# Altium PCB 搅拌杯PCB.PcbDoc
Units mm, origin at the board's own origin, x right, y up, seen from the top; angles counter-clockwise.
Board outline 36 x 32.5 mm, 2 copper layers (Top Layer, Bottom Layer); 74 components, 45 nets, 191 pads, 40 vias.
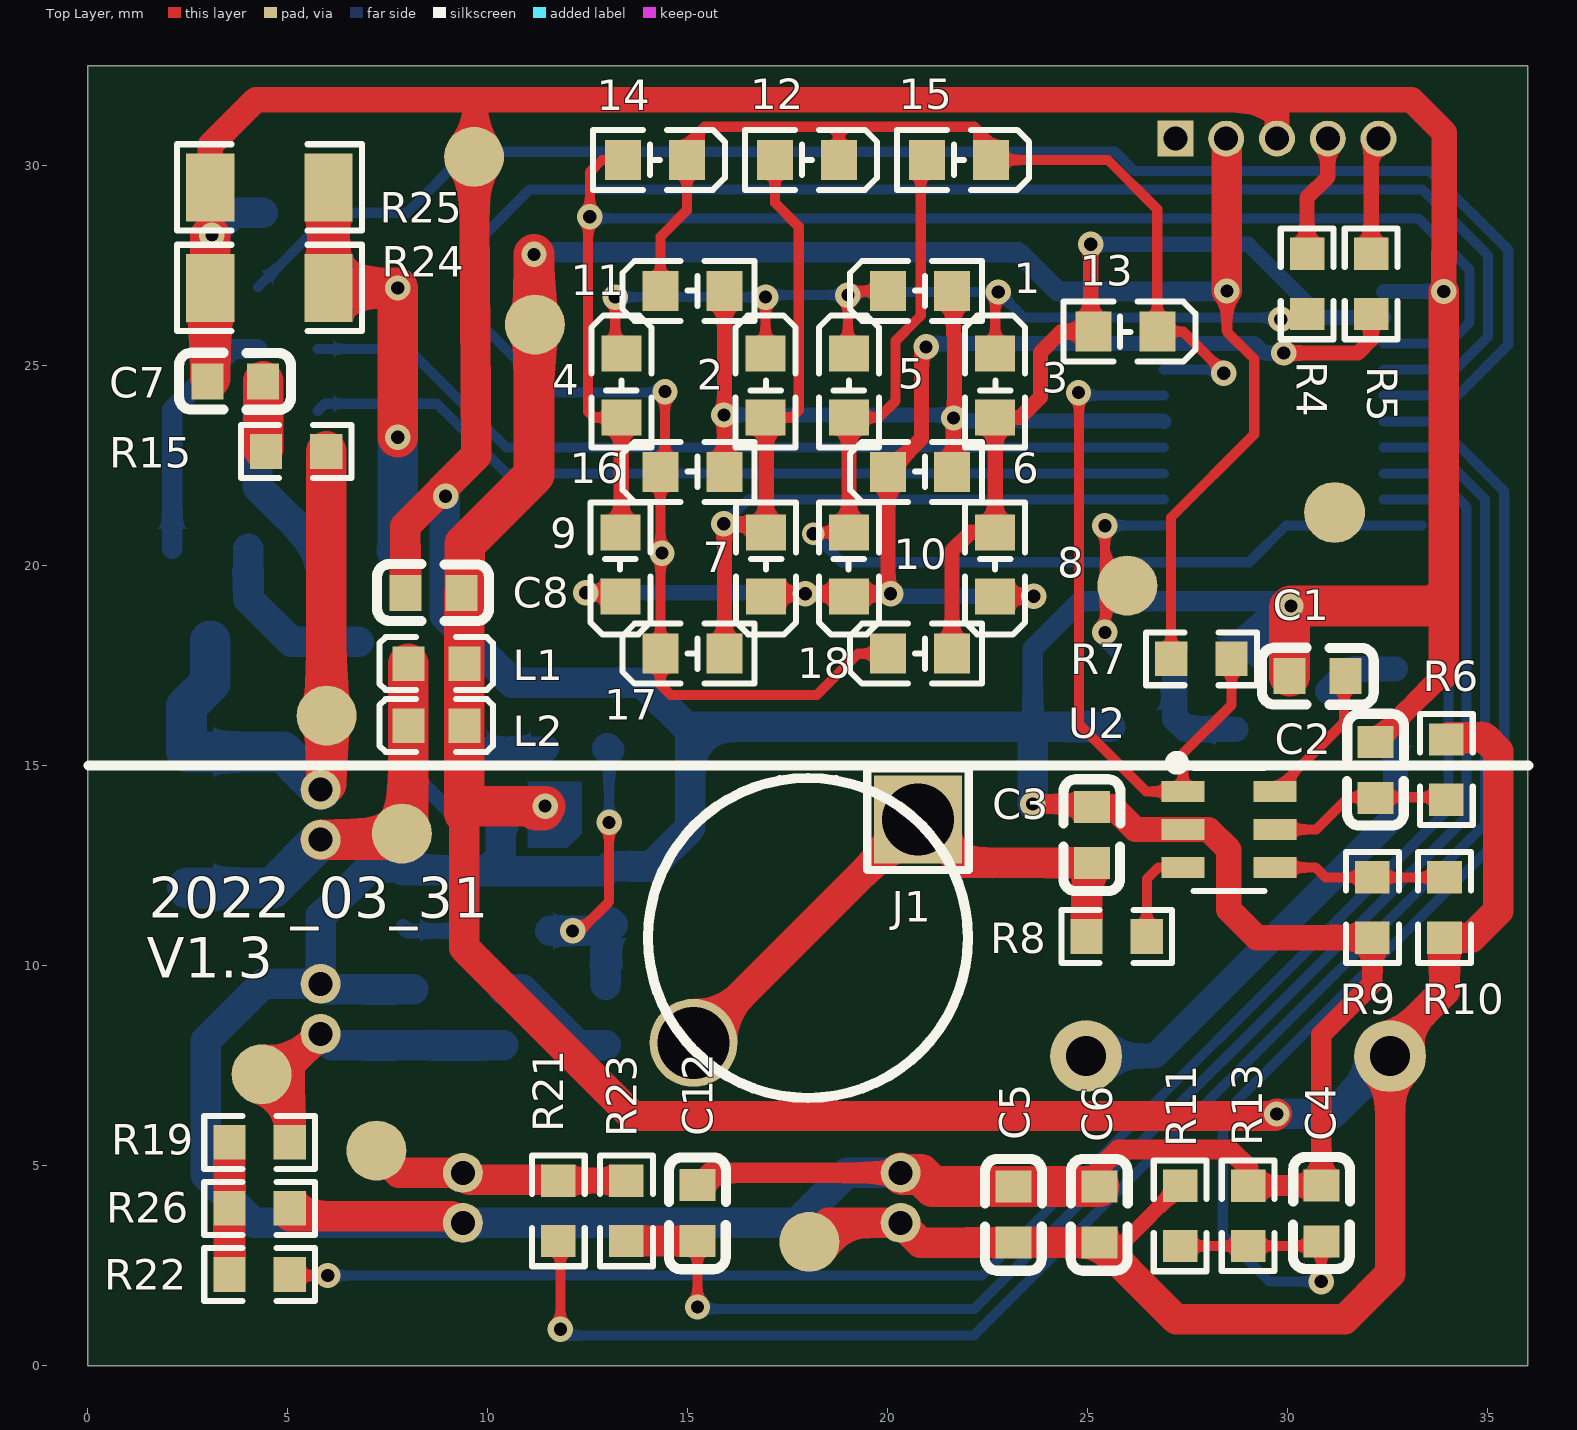
[diagram p0: Top Layer view]
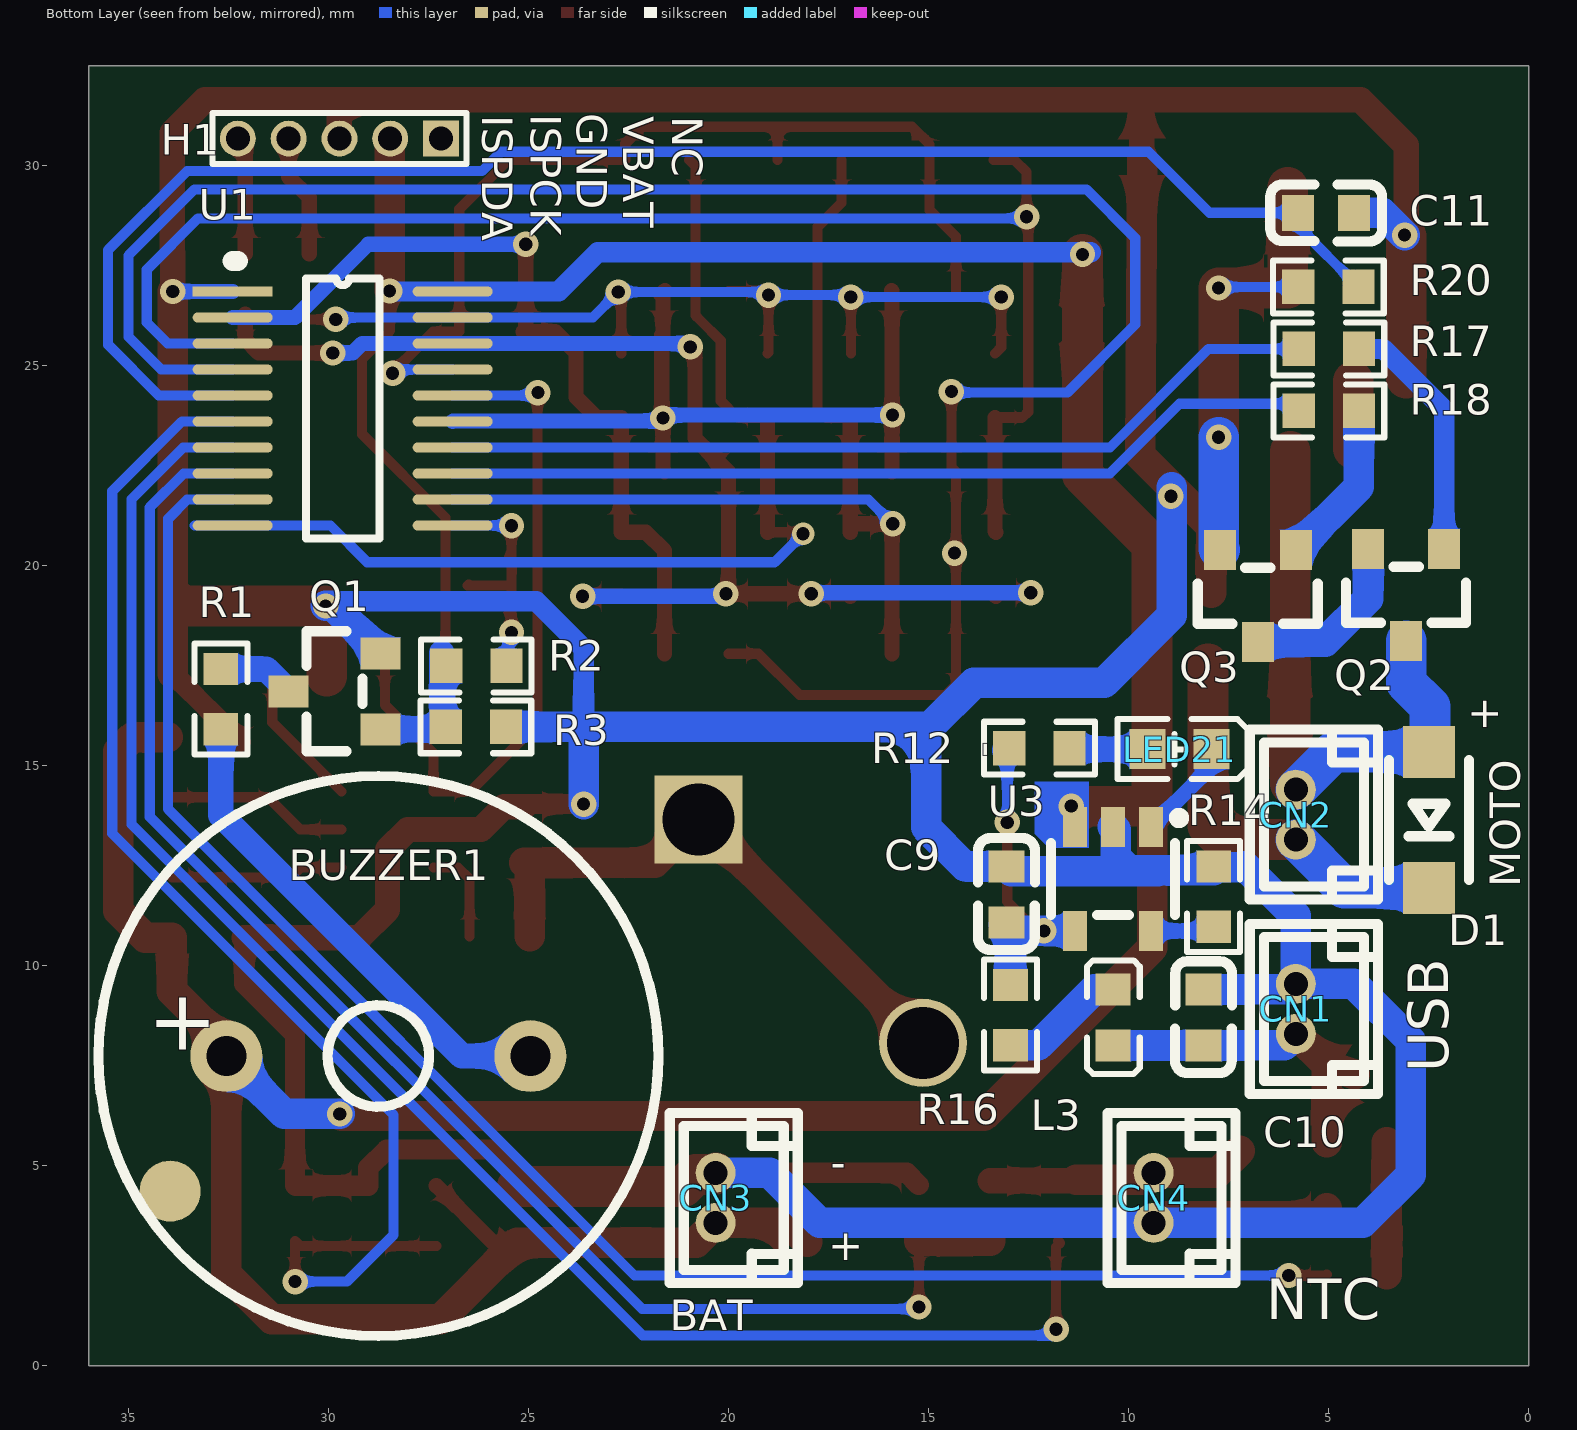
[diagram p1: Bottom Layer view, seen from below]

## Layer stack, top to bottom
Top Solder: solder mask 0.0102, Solder Resist, Dk 3.5
Top Layer: signal copper 0.0356
Dielectric 1: dielectric 0.32, FR-4, Dk 4.8
Bottom Layer: signal copper 0.0356
Bottom Solder: solder mask 0.0102, Solder Resist, Dk 3.5

## Board outline
0,0 0,32.5 36,32.5 36,0

## Design rules (kind name [scope] priority, off if disabled: settings)
Clearance [All] p1: gap=0.203 ignorepadtopadclearanceinfootprint=FALSE except(0: Arc-Hole Track-Hole SMDPad-Hole THPad-Hole Via-Hole Fill-Hole Poly-Hole Region-Hole Text-Hole)
ComponentClearance [All] p1 off: gap=0.254 collisioncheckmode=3 verticalgap=0.254 showdistances=FALSE
PolygonConnect [All] p1: connectstyle=Relief reliefconductorwidth=0.254 reliefentries=4 polygonreliefangle="90 Angle" airgapwidth=0.254
RoutingVias [All] p1: holewidth=0.711 width=1.27 viastyle="Through Hole" minholewidth=0.254 minwidth=0.254 maxholewidth=0.711 maxwidth=1.27
SolderMaskExpansion [All] p1: expansion=0.102 istentingtop=FALSE
Width [All] p1: maxlimit=1.27 minlimit=0.203 preferedwidth=0.254
29 further rules are at their usual default settings.

## Components (designator, comment, footprint, x,y, rotation, side; value= is the part's Value field where it differs from the comment)
1 "LED-0603_W" LED0603-FD_WHITE 20.803,26.873 r180 top (schematic designator LED1)
2 "LED-0603_W" LED0603-FD_WHITE 16.942,24.511 r90 top (schematic designator LED2)
3 "LED-0603_W" LED0603-FD_WHITE 22.682,24.511 r90 top (schematic designator LED3)
4 "LED-0603_W" LED0603-FD_WHITE 13.335,24.511 r90 top (schematic designator LED4)
5 "LED-0603_W" LED0603-FD_WHITE 19.025,24.511 r90 top (schematic designator LED5)
6 "LED-0603_W" LED0603-FD_WHITE 20.803,22.352 r180 top (schematic designator LED6)
7 "LED-0603_W" LED0603-FD_WHITE 16.955,20.041 r270 top (schematic designator LED7)
8 "LED-0603_W" LED0603-FD_WHITE 22.682,20.041 r270 top (schematic designator LED8)
9 "LED-0603_W" LED0603-FD_WHITE 13.31,20.041 r270 top (schematic designator LED9)
10 "LED-0603_W" LED0603-FD_WHITE 19.025,20.041 r270 top (schematic designator LED10)
11 "LED-0603_W" LED0603-FD_WHITE 15.113,26.873 r180 top (schematic designator LED11)
12 "LED-0603_W" LED0603-FD_WHITE 17.977,30.15 r0 top (schematic designator LED12)
13 "LED-0603_W" LED0603-FD_WHITE 25.933,25.857 r0 top (schematic designator LED13)
14 "LED-0603_W" LED0603-FD_WHITE 14.173,30.15 r0 top (schematic designator LED14)
15 "LED-0603_W" LED0603-FD_WHITE 21.781,30.15 r0 top (schematic designator LED15)
16 "LED-0603_W" LED0603-FD_WHITE 15.113,22.352 r180 top (schematic designator LED16)
17 "LED-0603_W" LED0603-FD_WHITE 15.113,17.805 r180 top (schematic designator LED17)
18 "LED-0603_W" LED0603-FD_WHITE 20.803,17.805 r180 top (schematic designator LED18)
BUZZER1 "FMQ-BUZZER2" BUZ-TH_BD12.0-P7.60-D0.6-FD 28.753,7.747 r180 bottom
C1 "4.7nF" C0603 30.74,17.245 r180 top
C2 "0.1u" C0603 32.188,14.898 r270 top
C3 "nc" C0603 25.101,13.276 r90 top
C4 "0.1u" C0603 30.836,3.816 r270 top
C5 "1uF" C0603 23.139,3.785 r90 top
C6 "0.1u" C0603 25.286,3.785 r90 top
C7 "0.1u" C0603 3.683,24.613 r0 top
C8 "10uF" C0603 8.636,19.329 r0 top
C9 "4.7uF" C0603 13.056,11.791 r270 bottom
C10 "10uF" C0603 8.128,8.712 r270 bottom
C11 "0.1u" C0603 5.066,28.829 r0 bottom
C12 "0.1u" C0603 15.24,3.821 r90 top
CN1 "0530470210" CONN-TH_0530470210 5.817,8.925 r90 bottom
CN2 "0530470210" CONN-TH_0530470210 5.817,13.782 r90 bottom
CN3 "0530470210" CONN-TH_0530470210 20.32,4.201 r90 bottom
CN4 "0530470210" CONN-TH_0530470210 9.373,4.201 r90 bottom
D1 "1N4148W" SOD-123FL_L2.6-W1.6-LS3.4-RD 2.489,13.648 r270 bottom
H1 "HDR-F-2.54_1x5" 1.27mm_5PIN 27.187,30.683 r0 bottom
J1 "HDR-M-2.54_1x1" HDR-M-2.54_1X1 20.752,13.665 r0 top
L1 "22uH" L0603 8.712,17.551 r0 top
L2 "22uH" L0603 8.712,16.001 r0 top
L3 "BEAD" L0603 10.389,8.712 r270 bottom
LED21 "LED-0603_W" LED0603-FD_WHITE 8.725,15.418 r180 bottom
Q1 "2N7002" SOT-23_L2.9-W1.3-P0.95-LS2.4-BR 29.847,16.866 r180 bottom
Q2 "2N7002" SOT-23_L2.9-W1.3-P0.95-LS2.4-BR 3.059,19.279 r90 bottom
Q3 "2N7002" SOT-23_L2.9-W1.3-P0.95-LS2.4-BR 6.767,19.253 r90 bottom
R1 "50R" R0603 32.69,16.671 r90 bottom
R2 "1K" R0603 26.306,17.501 r180 bottom
R3 "100K" R0603 26.316,15.977 r180 bottom
R4 "100R" R0603 30.48,27.051 r270 top
R5 "100R" R0603 32.08,27.051 r270 top
R6 "0R" R0603 33.96,14.91 r90 top
R7 "10K" R0603 27.838,17.678 r180 top
R8 "1K" R0603 25.72,10.736 r180 top
R9 "NC" R0603 32.112,11.461 r90 top
R10 "NC" R0603 33.915,11.461 r90 top
R11 "3M" R0603 27.305,3.751 r90 top
R12 "1k" R0603 12.226,15.443 r180 bottom
R13 "1M" R0603 29.007,3.754 r270 top
R14 "1k" R0603 7.874,11.735 r90 bottom
R15 "1k" R0603 5.207,22.86 r0 top
R16 "0R" R0603 12.95,8.772 r270 bottom
R17 "100R" R0603 4.992,25.425 r180 bottom
R18 "100R" R0603 4.992,23.876 r180 bottom
R19 "1k" R0603 4.293,5.588 r0 top
R20 "1k" R0603 5.004,26.975 r180 bottom
R21 "200K" R0603 11.76,3.877 r90 top
R22 "1k" R0603 4.293,2.286 r0 top
R23 "1k" R0603 13.462,3.877 r270 top
R24 "1R" R1206 4.538,26.949 r0 top
R25 "1R" R1206 4.538,29.464 r0 top
R26 "100K" R0603 4.293,3.937 r0 top
U1 "ES7P0693FHTF" TSOP20 32.395,26.862 r180 bottom
U2 "AS01C(AI01)" SOT-23-6_L2.9-W1.6-P0.95-LS2.8-BL 28.527,13.411 r270 top
U3 "HE4054B" SOT-23-5_L3.0-W1.7-P0.95-LS2.8-BR 10.389,12.175 r90 bottom

## Footprints (in the part's own frame and the unit in brackets; to place one, negate y for a bottom-side part, rotate by r counter-clockwise, add the part's x,y. Pads: shape width x height; smd on the part's side, far side on the other; paste and mask are expansions set on the pad)
1.27mm_5PIN [mm]
  rect 0.9x0.9 hole 0.6: 1(0,0)
  round 0.9 hole 0.6: 2(1.27,0) 3(2.54,0) 4(3.81,0) 5(5.08,0)
  silkscreen extent -0.64,-0.64 5.71,0.64
BUZ-TH_BD12.0-P7.60-D0.6-FD [mm]
  round 1.8 hole 1: 1(-3.8,0) 2(3.8,0)
  silkscreen extent -7,-7 7,7
C0603 [mm]
  rect 0.8x0.9 smd: 1(-0.7,0) 2(0.7,0)
  silkscreen extent -1.41,-0.71 1.39,0.72
CONN-TH_0530470210 [mm]
  round 1 hole 0.6: 1(-0.625,0) 2(0.625,0)
  silkscreen extent -2.13,-2.05 2.13,1.15
HDR-M-2.54_1X1 [mm]
  rect 2.2x2.2 hole 1.8: 1(0,0)
  silkscreen extent -1.27,-1.27 1.27,1.27
L0603 [mm]
  rect 0.8x0.864 smd: 1(-0.7,0) 2(0.7,0)
  silkscreen extent -1.42,-0.65 1.41,0.67
LED0603-FD_WHITE [mm]
  rect 0.9x1 smd: 1(-0.8,0) 2(0.8,0)
  silkscreen extent -1.55,-0.75 1.75,0.75
R0603 [mm]
  rect 0.806x0.864 smd: 1(-0.753,0) 2(0.753,0)
  silkscreen extent -1.39,-0.66 1.39,0.66
R1206 [mm]
  rect 1.208x1.701 smd: 1(-1.479,0) 2(1.479,0)
  silkscreen extent -2.31,-1.08 2.31,1.08
SOD-123FL_L2.6-W1.6-LS3.4-RD [mm]
  rect 1.3x1.3 smd: 1(1.7,0) 2(-1.7,0)
  silkscreen extent -1.5,-1 1.5,1
SOT-23-5_L3.0-W1.7-P0.95-LS2.8-BR [mm]
  rect 1x0.6 smd: 1(1.3,-0.95) 2(1.3,0) 3(1.3,0.95) 4(-1.3,0.95) 5(-1.3,-0.95)
  silkscreen extent -0.9,-1.78 1.65,1.55
SOT-23-6_L2.9-W1.6-P0.95-LS2.8-BL [mm]
  rect 0.532x1.072 smd: 1(-0.95,-1.149) 2(0,-1.149) 3(0.95,-1.149) 4(0.95,1.149) 5(0,1.149) 6(-0.95,1.149)
  silkscreen extent -1.82,-1.45 1.54,0.89
SOT-23_L2.9-W1.3-P0.95-LS2.4-BR [mm]
  rect 1x0.8 smd: 1(1.15,-0.95) 2(1.15,0.95) 3(-1.15,0)
  silkscreen extent -0.7,-1.5 0.7,1.5
TSOP20 [mm]
  rect 2x0.25 smd: 1(0,0)
  oval 2x0.25 smd: 2(0,-0.65) 3(0,-1.3) 4(0,-1.95) 5(0,-2.6) 6(0,-3.25) 7(0,-3.9) 8(0,-4.55) 9(0,-5.2) 10(0,-5.85) 11(5.5,-5.85) 12(5.5,-5.2) 13(5.5,-4.55) 14(5.5,-3.9) 15(5.5,-3.25) 16(5.5,-2.6) 17(5.5,-1.95) 18(5.5,-1.3) 19(5.5,-0.65) 20(5.5,0)
  silkscreen extent 0,-6.18 3.66,0.76

## Part data
L3: library part 22uH
R1: library part 100R
R3: library part 1K
R6 R7 R16: library part NC
R11: library part 430k
R13: library part 430K
R21 R26: library part 33K

## Free pads (board coordinates)
  round 2.2 hole 1.8: 0(15.138,8.077)
  round 1.5 smd: 2(4.343,7.29) 2(5.969,16.256) 2(7.214,5.385) 2(7.849,13.31) 2(9.652,30.226) 2(11.176,26.035) 2(18.034,3.099) 2(25.984,19.507)
  round 1.524 smd: 3(31.166,21.336)
  round 2.54 on Top Solder: 3(31.166,21.336)
  round 1.524 smd far side: 3(33.96,4.369)
  round 2.54 on Bottom Solder: 3(33.96,4.369)

## Via types
v1: diameter 0.635, hole 0.33, Top Layer to Bottom Layer, tented both sides, 39 vias
v2: diameter 0.559, hole 0.33, Top Layer to Bottom Layer, 1 vias

## Nets (pads, with @x,y where several pads share a name; then routed paths per layer and width w, separated by ;. In a path a pad name is that pad's centre, name@x,y a point inside that pad or via, vN(x,y) a via of type N, cw(c..) or ccw(c..) an arc to the next point about the centre after c; other vN are vias at no path point)
BUZZER: pad.2@25.984,19.507 R2.2 U1.11 | length 5.9
  Top Layer w0.254: v1(25.425,18.339) pad.2@25.425,19.482 ; v1(25.425,21.006) pad.2@25.425,19.482 ; pad.2@26.492,19.533 26.518,19.507 25.984,19.507 25.451,19.507 pad.2@25.425,19.482
  Bottom Layer w0.254: v1(25.425,18.339) 25.425,18.07 R2.2@25.664,17.831 ; v1(25.425,21.006) 25.431,21.011 U1.11
GND: C1.2 C2.1 C3.2 C4.1 C5.2 C6.2 C7.1 C8.1 C9.1 C10.1 C11.1 C12.2 CN1.2 CN3.2 CN4.1 H1.3 pad.2@9.652,30.226 Q1.2 R3.2 R9.1 R13.1 R14.2 R24.1 R25.1 R26.2 U1.1 U2.2 U3.2 | length 192.5
  Top Layer w0.508: C12.2 15.545,4.826 CN3.2 ; v1(23.622,14.046) 25.031,14.046 C3.2 ; C6.2 25.286,4.94 25.756,5.41 28.55,5.41 29.007,4.953 R13.1 30.827,4.507 C4.1 30.836,8.28 32.112,9.556 R9.1 ; C2.1 33.895,17.306
  Top Layer w0.635: C7.1 C7.1@3.059,24.689 ; v1@3.059,28.27 R25.1 3.059,30.516 4.197,31.654 9.693,31.654 ; pad.2@9.652,30.226 9.693,31.591 9.693,31.598 9.693,31.654 ; C3.2 25.622,13.976 26.187,13.411 U2.2 28.016,13.411 28.524,12.903 28.524,11.405 29.221,10.708 R9.1 ; H1.3@29.727,30.836 29.727,31.267 29.34,31.654 ; 33.909,27.661 33.909,30.836 33.091,31.654 29.34,31.654 ; 9.693,31.654 29.34,31.654
  Top Layer w0.762: R26.2 5.046,3.742 9.092,3.742 9.258,3.576 CN4.1 ; C8.1 7.936,20.992 9.703,22.758 pad.2@9.652,30.226 ; 33.757,19.101 33.895,19.101 ; 33.895,17.306 33.895,19.101 ; v1(33.895,26.862) 33.895,19.101
  Top Layer w1.016: C7.1@3.059,24.689 R24.1 v1@3.059,28.245 ; CN3.2 20.359,4.787 20.822,4.787 21.124,4.485 C6.2 ; C1.2 30.04,18.966 v1(30.074,18.999) 33.655,18.999 33.757,19.101
  Bottom Layer w0.381: U1.1 v1(33.895,26.862)
  Bottom Layer w0.508: 23.622,16.104 23.622,17.932 24.803,19.113 29.959,19.113 v1(30.074,18.999)
  Bottom Layer w0.762: v1(3.099,28.27) 3.658,28.829 C11.1 ; R14.2 R14.2@7.874,12.471 ; C10.1 5.955,9.412 CN1.2 ; v1@8.915,21.971 8.915,18.771 10.612,17.074 13.863,17.074 14.96,15.977 15.062,15.977 ; 9.267,12.37 12.935,12.37 C9.1 14.091,12.49 15.062,13.462 15.062,15.977 ; U3.2 10.323,13.409 10.323,12.733 9.981,12.391 7.874,12.391 R14.2@7.874,12.471 ; CN3.2 18.974,4.826 17.724,3.576 CN4.1 4.146,3.576 2.946,4.775 2.946,8.128 4.369,9.55 CN1.2 ; v1(23.622,14.046) 23.622,15.977 ; 23.622,16.104 23.749,15.977 ; R3.2 23.749,15.977 ; Q1.2 29.88,18.999 v1(30.074,18.999) ; CN1.2 5.817,11.252 5.842,11.252 7.078,12.488 7.078,12.471 R14.2@7.874,12.471 ; 15.062,15.977 23.622,15.977 ; 23.622,15.977 23.749,15.977
  other v1: 8.941,21.742
IO_OUT: R21.1 U1.7 | length 41.9
  Top Layer w0.254: R21.1 11.709,3.073 11.811,2.971 v1(11.811,0.914)
  Bottom Layer w0.254: v1(11.811,0.914) 11.963,0.762 22.147,0.762 34.925,13.54 34.925,21.666 33.63,22.962 U1.7
ISPCK: H1.4 R4.1 | length 3.2
  Top Layer w0.381: R4.1 30.48,29.21 30.997,29.727 H1.4 H1.4@30.997,30.836
ISPDA: H1.5 R5.1 | length 3.1
  Top Layer w0.381: R5.1 32.08,30.649 H1.5@32.267,30.836
LED_IO_0: 1.2 2.2 3.2 4.2 5.2 R4.2 U1.19 | length 24.9
  Top Layer w0.254: v1(13.183,26.721) 13.183,25.463 4.2 ; 2.2 v1(16.942,26.721) ; 5.2 18.999,25.336 v1(18.999,26.772) 19.101,26.873 1.2 ; 3.2 22.682,26.772 v1(22.758,26.848) ; v1(29.82,26.162) 30.556,26.162 R4.2@30.605,26.212
  Bottom Layer w0.254: v1(13.183,26.721) v1(16.942,26.721) 16.992,26.772 v1(18.999,26.772) 18.923,26.848 v1(22.758,26.848) 23.395,26.212 U1.19 29.77,26.212 v1(29.82,26.162)
LED_IO_1: 6.2 7.2 8.2 9.2 10.2 R5.2 U1.18 | length 32.9
  Top Layer w0.381: v1(12.446,19.329) 13.348,19.329 13.373,19.304 9.2 ; 7.2 17.019,19.304 v1(17.932,19.304) v1@20.003,19.304 ; 6.2 v1@20.003,19.304 ; 6.2@20.041,22.39 20.841,23.19 20.841,25.387 20.879,25.349 20.98,25.451 v1(20.955,25.476) ; v1(20.066,19.304) v1@20.003,19.304 ; 8.2 v1(23.647,19.241) ; v1(29.896,25.324) 31.75,25.324 32.08,25.654 R5.2
  Bottom Layer w0.381: v1(12.446,19.329) 17.907,19.329 v1(17.932,19.304) ; v1(20.066,19.304) 20.129,19.241 v1(23.647,19.241) ; v1@20.913,25.478 20.937,25.502 20.955,25.483 v1(20.955,25.476) 21.04,25.562 U1.18 29.159,25.562 29.397,25.324 v1(29.896,25.324)
LED_IO_2: 11.2 12.2 13.2 14.2 15.2 U1.17 | length 24.5
  Top Layer w0.254: 11.2 14.313,28.232 14.973,28.892 14.2 14.973,30.535 15.418,30.98 18.777,30.98 ; 12.2 18.777,30.98 ; v1(28.397,24.816) 28.397,24.841 27.381,25.857 13.2 26.733,28.918 25.502,30.15 15.2 22.581,30.556 22.157,30.98 18.777,30.98
  Bottom Layer w0.254: U1.17 v1@28.397,24.912
LED_IO_3: 16.2 17.2 18.2 U1.4 | length 52.3
  Top Layer w0.254: v1(14.427,24.359) 14.427,22.466 16.2 17.2 14.313,17.03 14.568,16.775 18.223,16.775 19.253,17.805 18.2
  Bottom Layer w0.254: v1@14.173,24.333 11.532,24.333 9.83,26.035 9.83,28.194 11.049,29.413 33.35,29.413 35,27.763 35,25.729 34.183,24.912 U1.4 ; v1@14.326,20.32 v1(14.351,20.32) v1@14.427,20.396
LED_IO_4: 1.1 6.1 11.1 16.1 U1.15 | length 20.5
  Top Layer w0.381: 16.1 11.1 11.1@15.926,26.886 ; 1.1@21.59,26.886 1.1 21.692,26.784 21.641,26.733 21.641,25.796 21.666,25.771 21.666,23.724 v1(21.641,23.698) ; 6.1 21.641,22.39 v1(21.641,23.698) ; v1@21.641,23.749 v1(21.641,23.698)
  Bottom Layer w0.381: v1(15.9,23.774) v1@21.641,23.774 ; v1(21.641,23.698) v1@21.641,23.774 ; U1.15 26.885,23.622 21.615,23.622 21.565,23.673 21.565,23.698 v1@21.641,23.774
LED_IO_5: 2.1 7.1 12.1 17.1 U1.12 | length 25.6
  Top Layer w0.254: 2.1 17.59,23.711 17.772,23.893 17.772,28.481 17.177,29.077 12.1
  Top Layer w0.381: v1(15.896,21.052) v1@15.913,21.052 ; 17.1 v1@15.913,21.052 ; 7.1@16.744,21.052 v1@15.913,21.052 ; 2.1 16.955,23.697 7.1
  Bottom Layer w0.254: v1(15.896,21.052) 16.505,21.662 U1.12
LED_IO_6: 3.1 8.1 13.1 18.1 U1.2 | length 21
  Top Layer w0.381: 18.1 21.603,20.383 22.06,20.841 8.1 3.1 23.305,23.711 23.812,24.219 23.812,25.336 24.333,25.857 13.1@25.07,25.857 ; v1(25.07,28.042) 13.1@25.07,25.857 ; 13.1 13.1@25.07,25.857
  Bottom Layer w0.381: v1(25.07,28.042) 29.007,28.042 30.837,26.212 U1.2
LED_IO_7: 4.1 9.1 14.1 U1.3 | length 37.1
  Top Layer w0.254: 4.1 12.649,23.711 12.505,23.855 12.505,28.685 v1(12.548,28.727) 12.548,29.845 12.852,30.15 14.1
  Top Layer w0.381: 9.1 13.335,20.866 4.1
  Bottom Layer w0.254: v1@12.446,28.702 12.471,28.727 v1(12.548,28.727) ; v1@12.53,28.778 12.548,28.761 v1(12.548,28.727) ; U1.3 34.02,25.562 34.543,26.085 34.543,27.408 33.261,28.689 12.586,28.689 v1(12.548,28.727)
LED_IO_8: 5.1 10.1 15.1 U1.10 | length 27.3
  Top Layer w0.254: v2(18.136,20.803) 18.174,20.841 10.1 ; 5.1 19.774,23.711 20.193,24.13 20.193,25.63 20.712,26.149 20.714,26.149 20.823,26.258 20.823,29.992 15.1
  Top Layer w0.381: 10.1 5.1
  Bottom Layer w0.254: v2(18.136,20.803) 18.847,20.091 29.032,20.091 29.952,21.011 U1.10 U1.10@33.345,21.011
MOTO_CONTROL_A: R17.1 U1.14 | length 22.2
  Bottom Layer w0.254: R17.1 8.001,25.425 10.465,22.962 U1.14
MOTO_CONTROL_B: R18.1 U1.13 | length 21.9
  Bottom Layer w0.254: R18.1 5.923,24.054 8.726,24.054 10.468,22.312 U1.13
MOTO_CURRERN: C11.2 R20.2 U1.5 | length 39.9
  Bottom Layer w0.254: R20.2 5.766,28.49 C11.2 7.976,28.829 9.5,30.353 25.679,30.353 26.162,29.87 33.54,29.87 35.509,27.901 35.509,25.527 34.244,24.262 U1.5
NetBUZZER1_2: BUZZER1.2 R1.1 | length 12.4
  Bottom Layer w0.635: BUZZER1.2 26.67,7.747 32.69,13.767 R1.1
NetC1_1: C1.1 U2.6 | length 3.6
  Top Layer w0.254: U2.6 31.408,16.093 31.408,17.245 C1.1
NetC2_2: C2.2 R6.1 U2.5 | length 4.7
  Top Layer w0.254: U2.5 30.709,13.411 31.514,14.216 R6.1@34.017,14.216
NetC3_1: C3.1 J1.1 pad.0 R8.2 | length 14.6
  Top Layer w0.762: pad.0 J1.1@20.726,13.665 ; J1.1 21.841,12.576 C3.1 24.966,12.442 R8.2
NetC7_2: C7.2 R15.1 | length 1.8
  Top Layer w0.762: R15.1@4.383,22.931 R15.1
  Top Layer w1.016: R15.1@4.383,22.931 C7.2
NetC9_2: C9.2 R12.1 R16.1 U3.4 | length 8.4
  Top Layer w0.254: v1(12.116,10.875) 12.298,10.875 13.03,11.608 v1(13.03,13.589)
  Bottom Layer w0.254: v1(13.03,13.589) R12.1@13.03,15.392
  Bottom Layer w0.762: U3.4@11.557,10.875 v1(12.116,10.875) 12.84,10.875 C9.2@12.95,10.985 ; R16.1 C9.2@12.95,10.985 ; R12.1 R12.1@13.03,15.392 ; C9.2@12.95,10.985 C9.2@12.989,11.024 ; C9.2@12.989,11.024 13.123,11.024 C9.2 C9.2@12.989,11.024
NetCN2_1: CN2.1 D1.1 L1.1 L2.1 pad.2@7.849,13.31 | length 10.2
  Top Layer w1.016: CN2.1 7.671,13.157 8.012,13.499 L2.1 L1.1
  Bottom Layer w1.016: D1.1 4.608,11.948 CN2.1
NetCN2_2: CN2.2 D1.2 pad.2@5.969,16.256 Q2.3 R15.2 | length 15.3
  Top Layer w0.762: CN2.2 CN2.2@5.96,14.551
  Top Layer w1.016: CN2.2@5.96,14.551 R15.2
  Bottom Layer w1.016: Q2.3 3.059,17.08 2.464,16.485 2.464,15.374 D1.2 4.876,15.348 CN2.2
NetCN4_2: CN4.2 pad.2@7.214,5.385 R21.2 R23.1 | length 6.6
  Top Layer w0.635: 11.303,4.66 11.333,4.63 R21.2 R23.1
  Top Layer w0.762: pad.2@7.214,5.385 7.772,4.826 CN4.2 9.539,4.66 11.303,4.66
NetL3_1: L3.1 R16.2 | length 3.1
  Bottom Layer w0.762: L3.1 10.857,9.412 12.251,8.019 R16.2
NetLED21_1: LED21.1 R12.2 | length 2
  Bottom Layer w0.635: LED21.1 11.448,15.418 R12.2
NetLED21_2: LED21.2 U3.1 | length 2.6
  Bottom Layer w0.381: LED21.2 7.925,14.989 U3.1
NetQ1_1: Q1.1 R2.1 R3.1 | length 3.3
  Bottom Layer w0.635: R2.1@27.171,17.831 27.171,16.18 27.435,15.916 Q1.1
NetQ1_3: Q1.3 R1.2 | length 1.9
  Bottom Layer w0.635: Q1.3 31.555,17.424 R1.2
NetQ2_1: Q2.1 R17.2 | length 6.2
  Bottom Layer w0.508: Q2.1 2.109,23.902 3.632,25.425 R17.2
NetQ2_2: Q2.2 Q3.3 | length 4.5
  Bottom Layer w0.762: Q2.2 4.009,19.181 5.087,18.103 Q3.3
NetQ3_1: Q3.1 R18.2 | length 4.1
  Bottom Layer w0.762: R18.2 4.239,21.981 Q3.1
NetQ3_2: Q3.2 R20.1 R24.2 R25.2 | length 12.8
  Top Layer w1.016: R25.2 R24.2 v1(7.747,26.949) v1(7.747,23.216)
  Bottom Layer w0.254: R20.1 7.722,26.975 v1(7.747,26.949)
  Bottom Layer w1.016: Q3.2 7.747,20.433 v1(7.747,23.216)
NetR8_1: R8.1 U2.3 | length 2.5
  Top Layer w0.254: R8.1 26.473,12.173 26.761,12.461 U2.3
NetR9_2: R9.2 R10.2 U2.4 | length 4.3
  Top Layer w0.254: U2.4 30.693,12.461 30.941,12.214 R9.2 R10.2
NetR14_1: R14.1 U3.5 | length 1.6
  Bottom Layer w0.381: R14.1 7.98,10.875 U3.5
NetR19_1: R19.1 R22.1 R26.1 | length 3.3
  Top Layer w0.762: R22.1 R26.1 R19.1
NTC_IN: C12.1 R23.2 U1.8 | length 38.1
  Top Layer w0.254: C12.1@15.238,3.124 C12.1 v1(15.24,1.473)
  Top Layer w0.762: R23.2 C12.1@15.238,3.124
  Bottom Layer w0.254: v1(15.24,1.473) 15.24,1.626 15.443,1.422 22.16,1.422 34.468,13.73 34.468,21.463 33.619,22.312 U1.8
TOUCH_IN: R7.1 U1.16 U2.1 | length 17.7
  Top Layer w0.254: v1(24.765,24.333) 24.765,24.384 24.778,24.397 24.778,16.04 26.457,14.361 U2.1 27.378,15.313 28.592,16.527 R7.1
  Bottom Layer w0.254: v1(24.765,24.333) 24.841,24.257 26.891,24.257 U1.16
USB_CHECK: R22.2 U1.9 | length 42.9
  Top Layer w0.254: R22.2 5.071,2.261 v1(5.994,2.261)
  Bottom Layer w0.254: v1(5.994,2.261) 22.352,2.261 34.011,13.919 34.011,21.184 33.533,21.661 U1.9
USB_IN: C10.2 CN1.1 L3.2 pad.2@4.343,7.29 R19.2 | length 8.5
  Top Layer w0.762: pad.2@4.343,7.29 pad.2@5.046,7.529 ; R19.2 pad.2@5.046,7.529 ; CN1.1 pad.2@5.046,7.529
  Bottom Layer w0.762: CN1.1 6.105,8.012 C10.2 L3.2
VBAT: BUZZER1.1 C5.1 C6.1 C8.2 CN3.1 H1.2 L1.2 L2.2 pad.2@11.176,26.035 pad.2@18.034,3.099 R6.2 R7.2 R10.1 R11.2 U1.20 U3.3 | length 114.2
  Top Layer w0.254: R7.2 27.076,17.687 27.076,21.209 29.159,23.292 29.159,25.171 28.473,25.857 v1(28.473,26.873)
  Top Layer w0.381: C6.1 25.885,3.085 R11.2
  Top Layer w0.762: 9.412,13.818 9.412,10.451 13.614,6.248 29.667,6.248 v1(29.718,6.299) ; pad.2@18.034,3.099 18.511,3.576 CN3.1 20.811,3.085 C6.1 27.202,1.168 31.42,1.168 32.553,2.301 BUZZER1.1 32.553,8.01 33.915,9.373 R10.1 34.584,10.708 35.255,11.379 35.255,15.367 34.9,15.723 R6.2@34.017,15.723 ; v1(28.473,26.873) H1.2@28.473,30.683
  Top Layer w1.016: C8.2@9.412,19.329 L1.2 L2.2 9.412,13.818 9.59,13.995 v1(11.43,13.995) ; C8.2@9.423,19.075 9.423,20.549 11.151,22.276 v1(11.151,27.788) ; v1@11.201,13.89 v1@11.379,13.89
  Bottom Layer w0.508: v1@10.947,27.838 23.266,27.838 24.243,26.862 U1.20 28.462,26.862 v1(28.473,26.873) ; U3.3 11.339,14.361 11.425,14.275 11.379,14.229 11.43,14.178 v1(11.43,13.995)
  Bottom Layer w0.762: v1(29.718,6.299) 31.105,6.299 BUZZER1.1
VBAT_IN: C4.2 R11.1 R13.2 U1.6 | length 32.8
  Top Layer w0.254: R11.1 29.004,2.998 R13.2 30.72,3.001 C4.2 v1(30.836,2.108)
  Bottom Layer w0.254: v1(30.836,2.108) 29.54,2.108 28.372,3.277 28.372,6.274 35.408,13.31 35.408,21.869 33.665,23.612 U1.6
pads on no net: H1.1

## Other copper
Top Layer:
  rectangle net GND: 33.579,26.645 34.214,27.889
Bottom Layer:
  region net VBAT: 12.344,14.605 12.344,13.31 11.989,12.954 10.998,12.954 10.998,14.605

## Silkscreen, mask and mechanical layers (free items; w line width, h text height)
Top Overlay:
  circle w0.254: c18,10.701 r4
  lines w0.254: 0.015,15.014 36.015,15.014
  text "2022_03_31" at 1.524,11.201 h1.02
  text "V1.3" at 1.473,9.703 h1.02
Bottom Overlay:
  text "GND" at 23.8,31.318 h0.76 r90
  text "ISPCK" at 24.943,31.293 h0.76 r90
  text "ISPDA" at 26.162,31.267 h0.76 r90
  text "NC" at 21.412,31.242 h0.76 r90
  text "VBAT" at 22.631,31.242 h0.76 r90
  text "+" at 0.762,15.85 h0.76 r270
  text "-" at 13.284,15.215 h0.76 r270
  text "MOTO" at 0.203,11.963 h0.76 r270
  text "USB" at 2.007,7.341 h1.02 r270
  text "-" at 17.45,4.699 h0.76
  text "+" at 17.501,2.642 h0.76
  text "NTC" at 6.553,1.168 h1.02
  text "BAT" at 21.463,0.889 h0.76
Mechanical 1:
  the board outline again, w0.254

## Text inside footprints (layer, text, board x,y; h text height)
BUZZER1: Bottom Overlay "+" at 34.519,7.899 h1.52